# EAGLE board Down_Main_Board (EAGLE 9.6.2)

Size 79.88 x 73.5 mm. Coordinates in mm from the lower left corner, seen from the top.
Outline: 79.88,42.18 arc39 69.65,66.78
Outline: 69.65,66.78 65.73,65.35 arc-120 60.43,69.8 61.08,73.5 18.8,73.5 19.45,69.8 arc-120 14.15,65.35 10.23,66.78 arc39 0,42.18 21.5,4.94 24.37,7.36 arc-120 30.88,4.99 31.61,0.88 arc24 48.27,0.88 49,4.99 arc-120 55.51,7.36 58.38,4.94 79.88,42.18
Outline: 79.88,42.18 arc39 69.65,66.78
Copper layers (1*16): Top 0.035mm / dielectric 1.5mm / Bottom 0.035mm
Design rules "default": minimum track width 6mil, minimum drill 0.35mm, track to track 6mil, track to pad 6mil, pad to pad 6mil, via to via 6mil, smd to smd 6mil, copper to edge 40mil, drill to drill 6mil, minimum pad ring 10mil, minimum via ring 8mil, stop-mask expansion 4mil, vias tented up to drill 0mil, thermal gap 10mil

## Footprints (pad centres in the part's own frame; a part is rotated, then mirrored left to right if it is on the bottom)
XQ-02A = smd 2.2 x 1.3: P$1 -18.2,-11; P$2 -18.2,-6.5; P$3 -18.2,-4.5; P$4 -18.2,-2.5; P$5 -18.2,9; P$6 -18.2,11; P$7 18.2,11; P$8 18.2,7.5; P$9 18.2,-2; P$10 18.2,-6; P$11 18.2,-8; P$12 18.2,-10; P$13 -18.2,7
C0603 = smd 1.1 x 1: 1 -0.85,0; 2 0.85,0
ECAP220-CMD = smd 1.2 x 3.5: P$1 0,2.85; P$2 0,-2.85
MCXJPHSTTH1 = drill 1.1 pad 1.65: 1 0,0 | drill 1.4 pad 2.1: 2 -2.54,2.54; 3 -2.54,-2.54; 4 2.54,-2.54; 5 2.54,2.54
U.FL-R-SMT-1(10) = smd 1.05 x 2.2: 1 -1.475,0; 2 1.475,0 | smd 1.05 x 1.05: 3 0,1.525
1X09 = drill 1.016 long: 1 -10.16,0; 2 -7.62,0; 3 -5.08,0; 4 -2.54,0; 5 0,0; 6 2.54,0; 7 5.08,0; 8 7.62,0; 9 10.16,0
2X13 = drill 1.016 octagon: 1 -15.24,-1.27; 2 -15.24,1.27; 3 -12.7,-1.27; 4 -12.7,1.27; 5 -10.16,-1.27; 6 -10.16,1.27; 7 -7.62,-1.27; 8 -7.62,1.27; 9 -5.08,-1.27; 10 -5.08,1.27; 11 -2.54,-1.27; 12 -2.54,1.27; 13 0,-1.27; 14 0,1.27; 15 2.54,-1.27; 16 2.54,1.27; 17 5.08,-1.27; 18 5.08,1.27; 19 7.62,-1.27; 20 7.62,1.27; 21 10.16,-1.27; 22 10.16,1.27; 23 12.7,-1.27; 24 12.7,1.27; 25 15.24,-1.27; 26 15.24,1.27
LIS3MDL-CGMSU-NB2023 = drill 1.016 octagon: P$1 -8.89,-4; P$2 -6.35,-4; P$3 -3.81,-4; P$4 -1.27,-4; P$5 1.27,-4; P$6 3.81,-4; P$7 6.35,-4; P$8 8.89,-4
LSM6DS3-GY-NB2023 = drill 1.016 octagon: P$1 -7.62,-5; P$2 -5.08,-5; P$3 -2.54,-5; P$4 0,-5; P$5 2.54,-5; P$6 5.08,-5; P$7 7.62,-5
SD = smd 0.8 x 2: CLK 6,-15.77; CMD 8.2,-15.77; DAT0 3.8,-15.77; DAT1 2.7,-15.77; DAT2 10.4,-15.77; DAT3 9.3,-15.77; VDD 7.1,-15.77; VSS 4.9,-15.77 | smd 1.5 x 1.7: P$9 0.75,-0.85; P$13 14.25,-0.85 | smd 1.6 x 1.5: P$10 1.3,-15.7 | smd 1.29 x 1.3: P$11 0.645,-14.05 | smd 1.29 x 1.4: P$12 0.645,-6.65 | smd 1.7 x 1.5: P$14 12.45,-15.7
NRF24L01_ML01SP4 = smd 1.5 x 0.8: P$1 -9,4.445; P$2 -9,3.175; P$3 -9,1.905; P$4 -9,0.635; P$5 -9,-0.635; P$6 -9,-1.905; P$7 -9,-3.175; P$8 -9,-4.445 | smd 1.5 x 1.5: P$9 4,7.25; P$10 4,-7.25
R0603 = smd 1 x 1.1: 1 -0.85,0; 2 0.85,0
BME280-PINS-ONLY = drill 1.016 octagon: P$1 -3.81,5.33; P$2 -1.27,5.33; P$3 1.27,5.33; P$4 3.81,5.33

## Placement (x,y rotation side)
AMP  XQ-02A  [XQ-02A]  35.84,37.3 0 top
C1  100nF  [C0603]  29.92,16.71 180 top
C7  100nF  [C0603]  40.94,18.71 180 top
C10  220uF  [ECAP220-CMD]  9.67,46.3 270 top
J1  MCX-J-P-H-ST-TH1  [MCXJPHSTTH1]  59.81,29.27 180 top
J2  U.FL-R-SMT-1_10_  [U.FL-R-SMT-1(10)]  13.84,32.8 270 top
JP1  [1X09]  9.94,32 120 top
JP2  [1X09]  69.94,32 240 top
JP3  [2X13]  39.94,70 0 top
LIS3MDL  LIS3MDL-CJMCUБез_отв._зеркальный  [LIS3MDL-CGMSU-NB2023]  16.84,56 180 top
LSM6DS3  LSM6DS3-GY-NB2023  [LSM6DS3-GY-NB2023]  64.54,55 180 bottom
MICROSD  SD  [SD]  46.94,1 180 top
NRF24L01P  NRF24L01_ML01SP4  [NRF24L01_ML01SP4]  45.94,59 0 top
R2  3k3  [R0603]  33.34,20.9 0 top
R7  3k3  [R0603]  36.44,20.9 0 top
R8  3k3  [R0603]  39.54,20.9 0 top
R9  3k3  [R0603]  43.94,20.9 0 top
R10  3k3  [R0603]  45.06,18.8 0 top
U$1  BME280BME280-PINS-ONLY  [BME280-PINS-ONLY]  56.94,16 60 top

## Library data of the parts
AMP C10 LIS3MDL LSM6DS3 MICROSD NRF24L01P = NEON-BLADE-2023
C1 C7 = rcl; SPICEPREFIX: C
J1 = MCX-J-P-H-ST-TH1; ARROW_PART_NUMBER: MCX-J-P-H-ST-TH1; ARROW_PRICE-STOCK: https://www.arrow.com/en/products/mcx-j-p-h-st-th1/samtec?region=nac; DESCRIPTION: Samtec MCXSeries, Through Hole MCX Jack jack, 50 Impedance, Solder Termination, 0 6GHz, Coaxial cable type; HEIGHT: 5.81mm; MANUFACTURER_NAME: SAMTEC; MANUFACTURER_PART_NUMBER: MCX-J-P-H-ST-TH1; MOUSER_PART_NUMBER: 200-MCXJPHSTTH1; MOUSER_PRICE-STOCK: https://www.mouser.co.uk/ProductDetail/Samtec/MCX-J-P-H-ST-TH1?qs=Cqqh%252BS766wnNti0C6DXzpQ%3D%3D
J2 = U.FL-R-SMT-1_10_; ARROW_PART_NUMBER: U.FL-R-SMT-1(10); ARROW_PRICE-STOCK: https://www.arrow.com/en/products/u.fl-r-smt-1-10/hirose-electric; DESCRIPTION: UFL SMT PCB receptable,DC-6GHz Hirose Straight 50 Surface Mount UFL Connector, Receptacle, Solder Termination Coaxial; HEIGHT: mm; MANUFACTURER_NAME: Hirose; MANUFACTURER_PART_NUMBER: U.FL-R-SMT-1(10); MOUSER_PART_NUMBER: 798-U.FL-R-SMT-110; MOUSER_PRICE-STOCK: https://www.mouser.co.uk/ProductDetail/Hirose-Connector/U.FL-R-SMT-110?qs=kL1ClTr6oBoOdtqlGQpQrQ%3D%3D
JP1-JP3 = pinhead
R2 R7-R10 = rcl; SPICEPREFIX: R
U$1 = NEON-BLADE-2024

## Nets
3V3: C7.2 LIS3MDL.P$1 LSM6DS3.P$6 MICROSD.VDD NRF24L01P.P$1 R2.2 R7.2 R8.2 R9.2 R10.2
5V: AMP.P$5 C1.2 C10.P$1
CE_NRF: NRF24L01P.P$2
CS_LIS: LIS3MDL.P$6
CS_LSM: LSM6DS3.P$2
CS_NRF: NRF24L01P.P$3
GND: AMP.P$1 AMP.P$2 AMP.P$4 AMP.P$10 AMP.P$12 AMP.P$13 C1.1 C7.1 C10.P$2 J1.2 J1.3 J1.4 J1.5 J2.1 J2.2 LIS3MDL.P$2 LSM6DS3.P$5 MICROSD.VSS NRF24L01P.P$8
LED1: AMP.P$8
LED2: AMP.P$9
MISO: LIS3MDL.P$5 LSM6DS3.P$1 NRF24L01P.P$6
MOSI: LIS3MDL.P$4 LSM6DS3.P$3 NRF24L01P.P$5
N$4: AMP.P$3 J2.3
N$5: AMP.P$11 J1.1
NRF_IRQ: NRF24L01P.P$7
SCK: LIS3MDL.P$3 LSM6DS3.P$4 NRF24L01P.P$4
SDIO_CK: MICROSD.CLK
SDIO_CMD: MICROSD.CMD R8.1
SDIO_DAT0: MICROSD.DAT0 R9.1
SDIO_DAT1: MICROSD.DAT1 R10.1
SDIO_DAT2: MICROSD.DAT2 R2.1
SDIO_DAT3: MICROSD.DAT3 R7.1
USIL_ON: AMP.P$7

## Tracks (layer width: path | path; a pad name or v marks a point on that pad's centre or on a via)
3V3  (9 unrouted)
5V  (2 unrouted)
GND  (18 unrouted)
MISO  (2 unrouted)
MOSI  (2 unrouted)
N$4  (1 unrouted)
N$5  (1 unrouted)
SCK  (2 unrouted)
SDIO_CMD  (1 unrouted)
SDIO_DAT0  (1 unrouted)
SDIO_DAT1  (1 unrouted)
SDIO_DAT2  (1 unrouted)
SDIO_DAT3  (1 unrouted)